# EAGLE board 2layer_shunt_test (EAGLE 9.2.2)
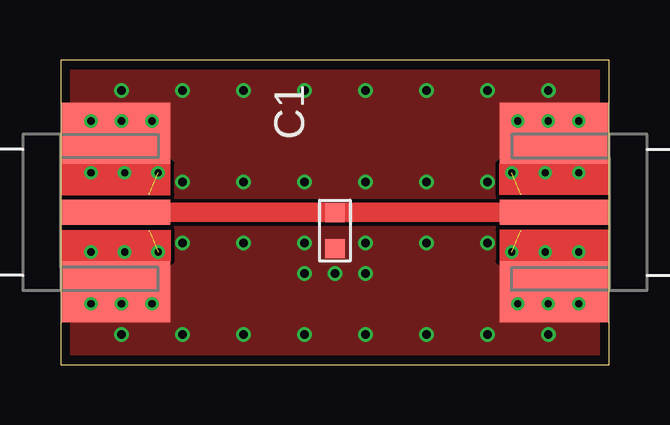
[diagram p0: board, top side]
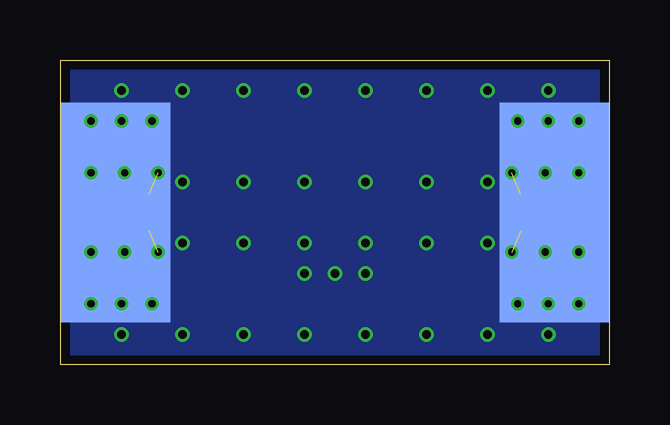
[diagram p1: board, bottom side, seen from below]

Size 22.86 x 12.7 mm. Coordinates in mm from the lower left corner, seen from the top.
Outline: 0,0 22.86,0 22.86,12.7 0,12.7 0,0
Copper layers (1*16): Top 0.035559375mm / dielectric 1.6mm / Bottom 0.035559375mm
Design rules "oshpark-2layer *": minimum track width 6mil, minimum drill 10mil, track to track 6mil, track to pad 6mil, pad to pad 6mil, via to via 6mil, smd to smd 6mil, copper to edge 15mil, drill to drill 6mil, minimum pad ring 5mil, minimum via ring 5mil, stop-mask expansion 2.5mil, vias tented up to drill 20mil, thermal gap 10mil
Net classes: 1 32/6: width 0.813 mm, clearance 0.152 mm

## Footprints (pad centres in the part's own frame; a part is rotated, then mirrored left to right if it is on the bottom)
C0603 = smd 0.8 x 0.8: P$1 -0.75,0; P$2 0.75,0
SMA_EDGE_LAUNCH_2L = smd 4.572 x 9.144 bottom: BOTTOM_GND 2.286,0 | smd 4.572 x 1.041: CENTER@1 2.286,0 | drill 0.3: GND@1 1.27,3.81; GND@2 3.81,3.81; GND@3 1.27,1.651; GND@4 4.064,1.651; GND@5 1.27,-1.651; GND@6 4.064,-1.651; GND@7 1.27,-3.81; GND@8 3.81,-3.81; GND@14 2.54,3.81; GND@15 2.54,-3.81; GND@16 2.667,-1.651; GND@17 2.667,1.651 | smd 0.051 x 0.051: GND@11 3.683,0.762; GND@12 3.683,-0.762 | smd 4.572 x 2.54: GND_PAD1 2.286,3.302; GND_PAD2 2.286,-3.302

## Placement (x,y rotation side)
C1  [C0603]  11.43,5.59 90 top
J1  [SMA_EDGE_LAUNCH_2L]  0,6.35 0 top
J2  [SMA_EDGE_LAUNCH_2L]  22.86,6.35 180 top

## Library data of the parts
C1 J1 J2 = yapo

## Nets
GND: C1.P$1 J1.BOTTOM_GND J1.GND@1 J1.GND@2 J1.GND@3 J1.GND@4 J1.GND@5 J1.GND@6 J1.GND@7 J1.GND@8 J1.GND@11 J1.GND@12 J1.GND@14 J1.GND@15 J1.GND@16 J1.GND@17 J1.GND_PAD1 J1.GND_PAD2 J2.BOTTOM_GND J2.GND@1 J2.GND@2 J2.GND@3 J2.GND@4 J2.GND@5 J2.GND@6 J2.GND@7 J2.GND@8 J2.GND@11 J2.GND@12 J2.GND@14 J2.GND@15 J2.GND@16 J2.GND@17 J2.GND_PAD1 J2.GND_PAD2
N$1 [32/6]: C1.P$2 J1.CENTER@1 J2.CENTER@1

## Tracks (layer width: path | path; a pad name or v marks a point on that pad's centre or on a via)
GND  (via drill 0.35)  (4 unrouted)
  other vias: 10.16,7.62 12.7,5.08 10.16,5.08 10.16,3.81 11.43,3.81 12.7,3.81 7.62,7.62 7.62,5.08 5.08,7.62 5.08,5.08 12.7,7.62 15.24,7.62 15.24,5.08 17.78,5.08 17.78,7.62 5.08,11.43 7.62,11.43 10.16,11.43 12.7,11.43 15.24,11.43 17.78,11.43 20.32,11.43 2.54,11.43 2.54,1.27 5.08,1.27 7.62,1.27 10.16,1.27 12.7,1.27 15.24,1.27 17.78,1.27 20.32,1.27
  pour Top (no thermals): 0,0 22.86,0 22.86,12.7 0,12.7
  pour Bottom (no thermals): 0,0 22.86,0 22.86,12.7 0,12.7
N$1
  Top 0.813: 2.29,6.34 J1.CENTER@1 C1.P$2 | C1.P$2 J2.CENTER@1 | C1.P$2